# Altium PCB ECUEXT1_23.PcbDoc
Units mm, origin at the board's own origin, x right, y up, seen from the top; angles counter-clockwise.
Board outline 56 x 44.32 mm, 2 copper layers (Top Layer, Bottom Layer); 17 components, 21 nets, 110 pads, 10 vias.
Unrouted connection lines stored in the file: 24.
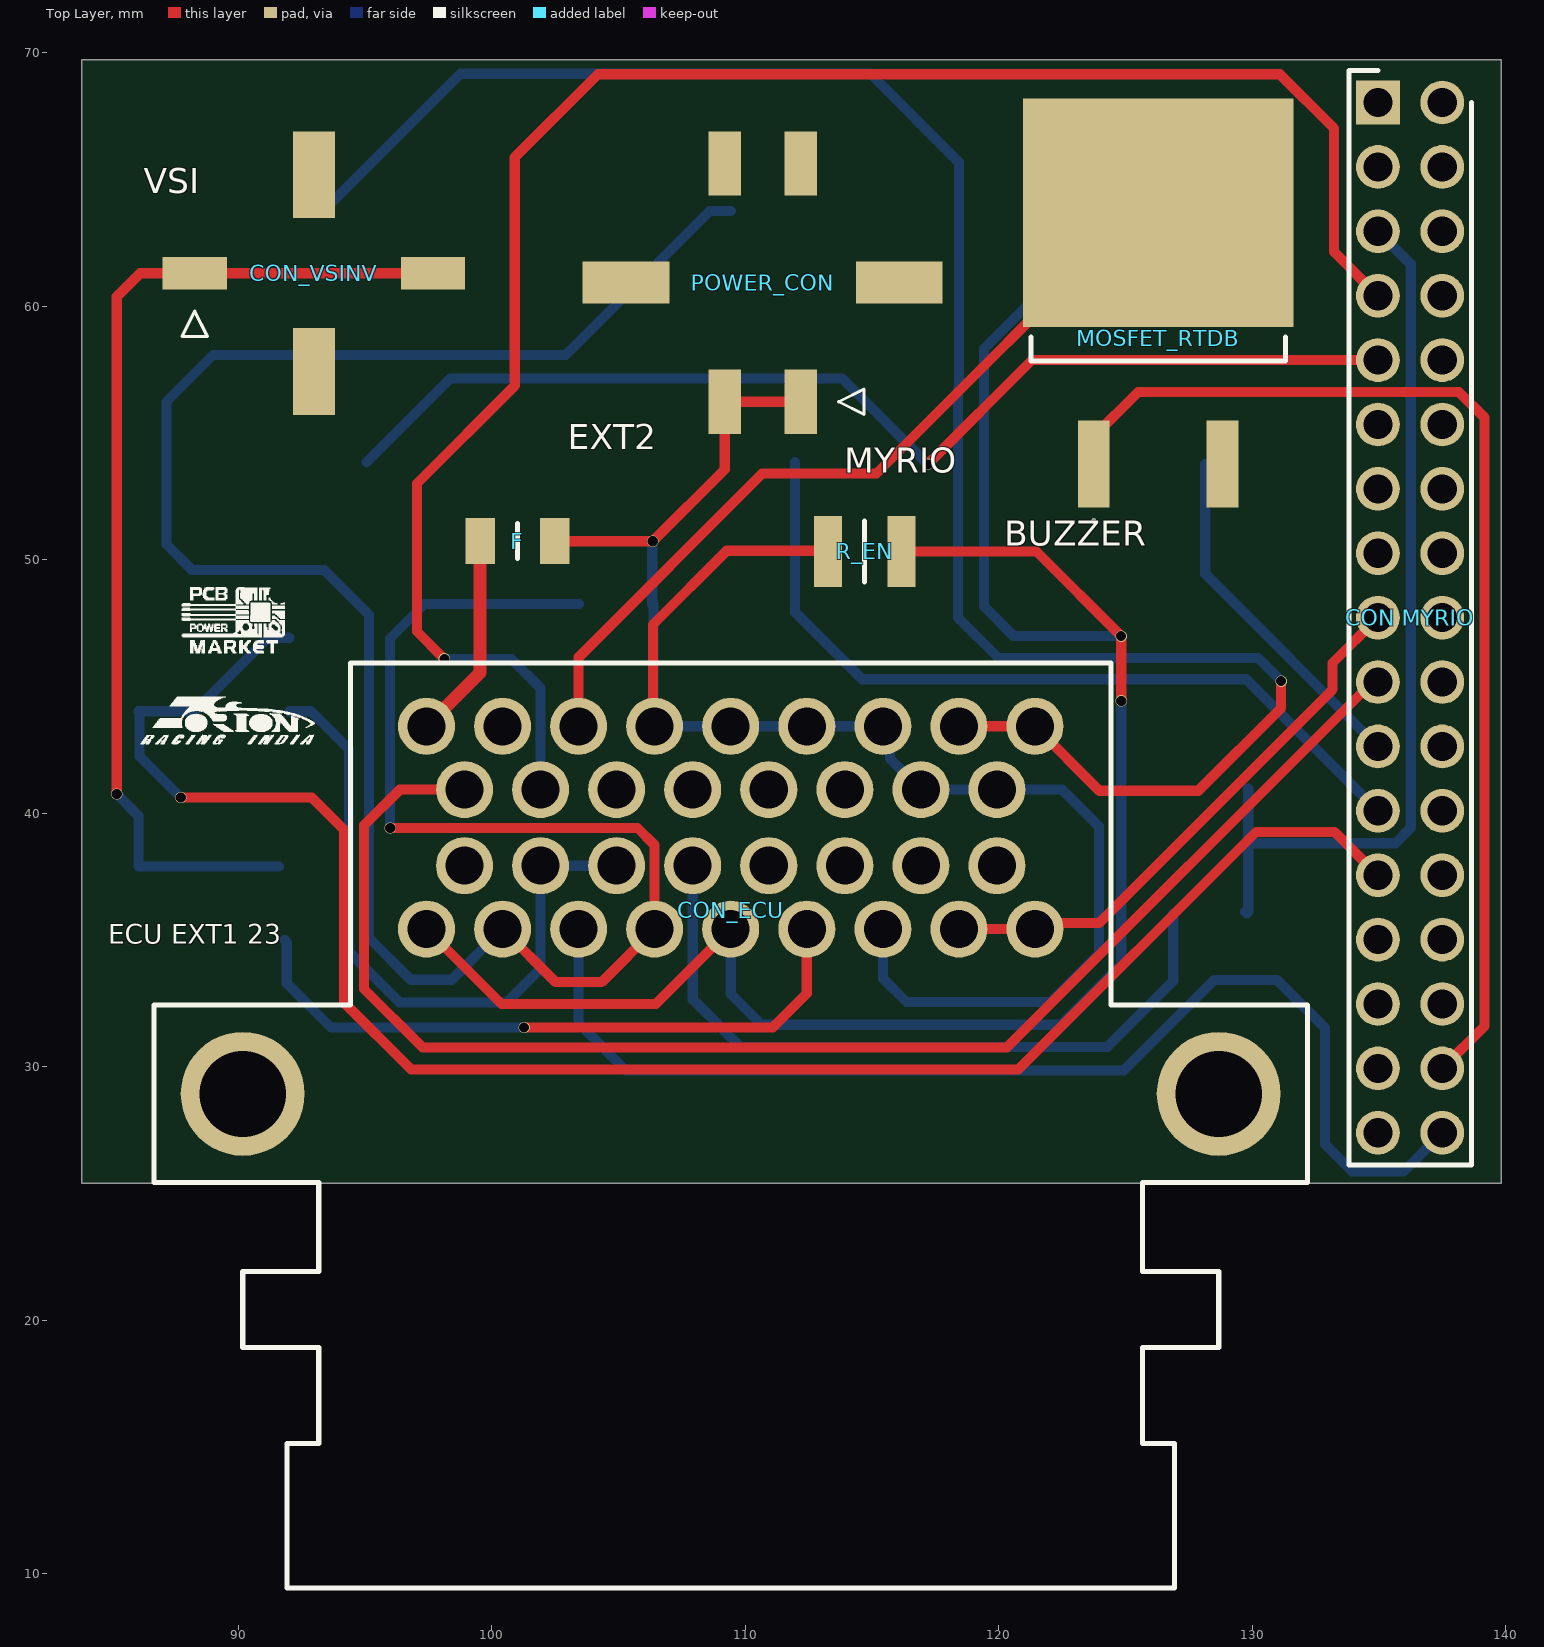
[diagram p0: Top Layer view]
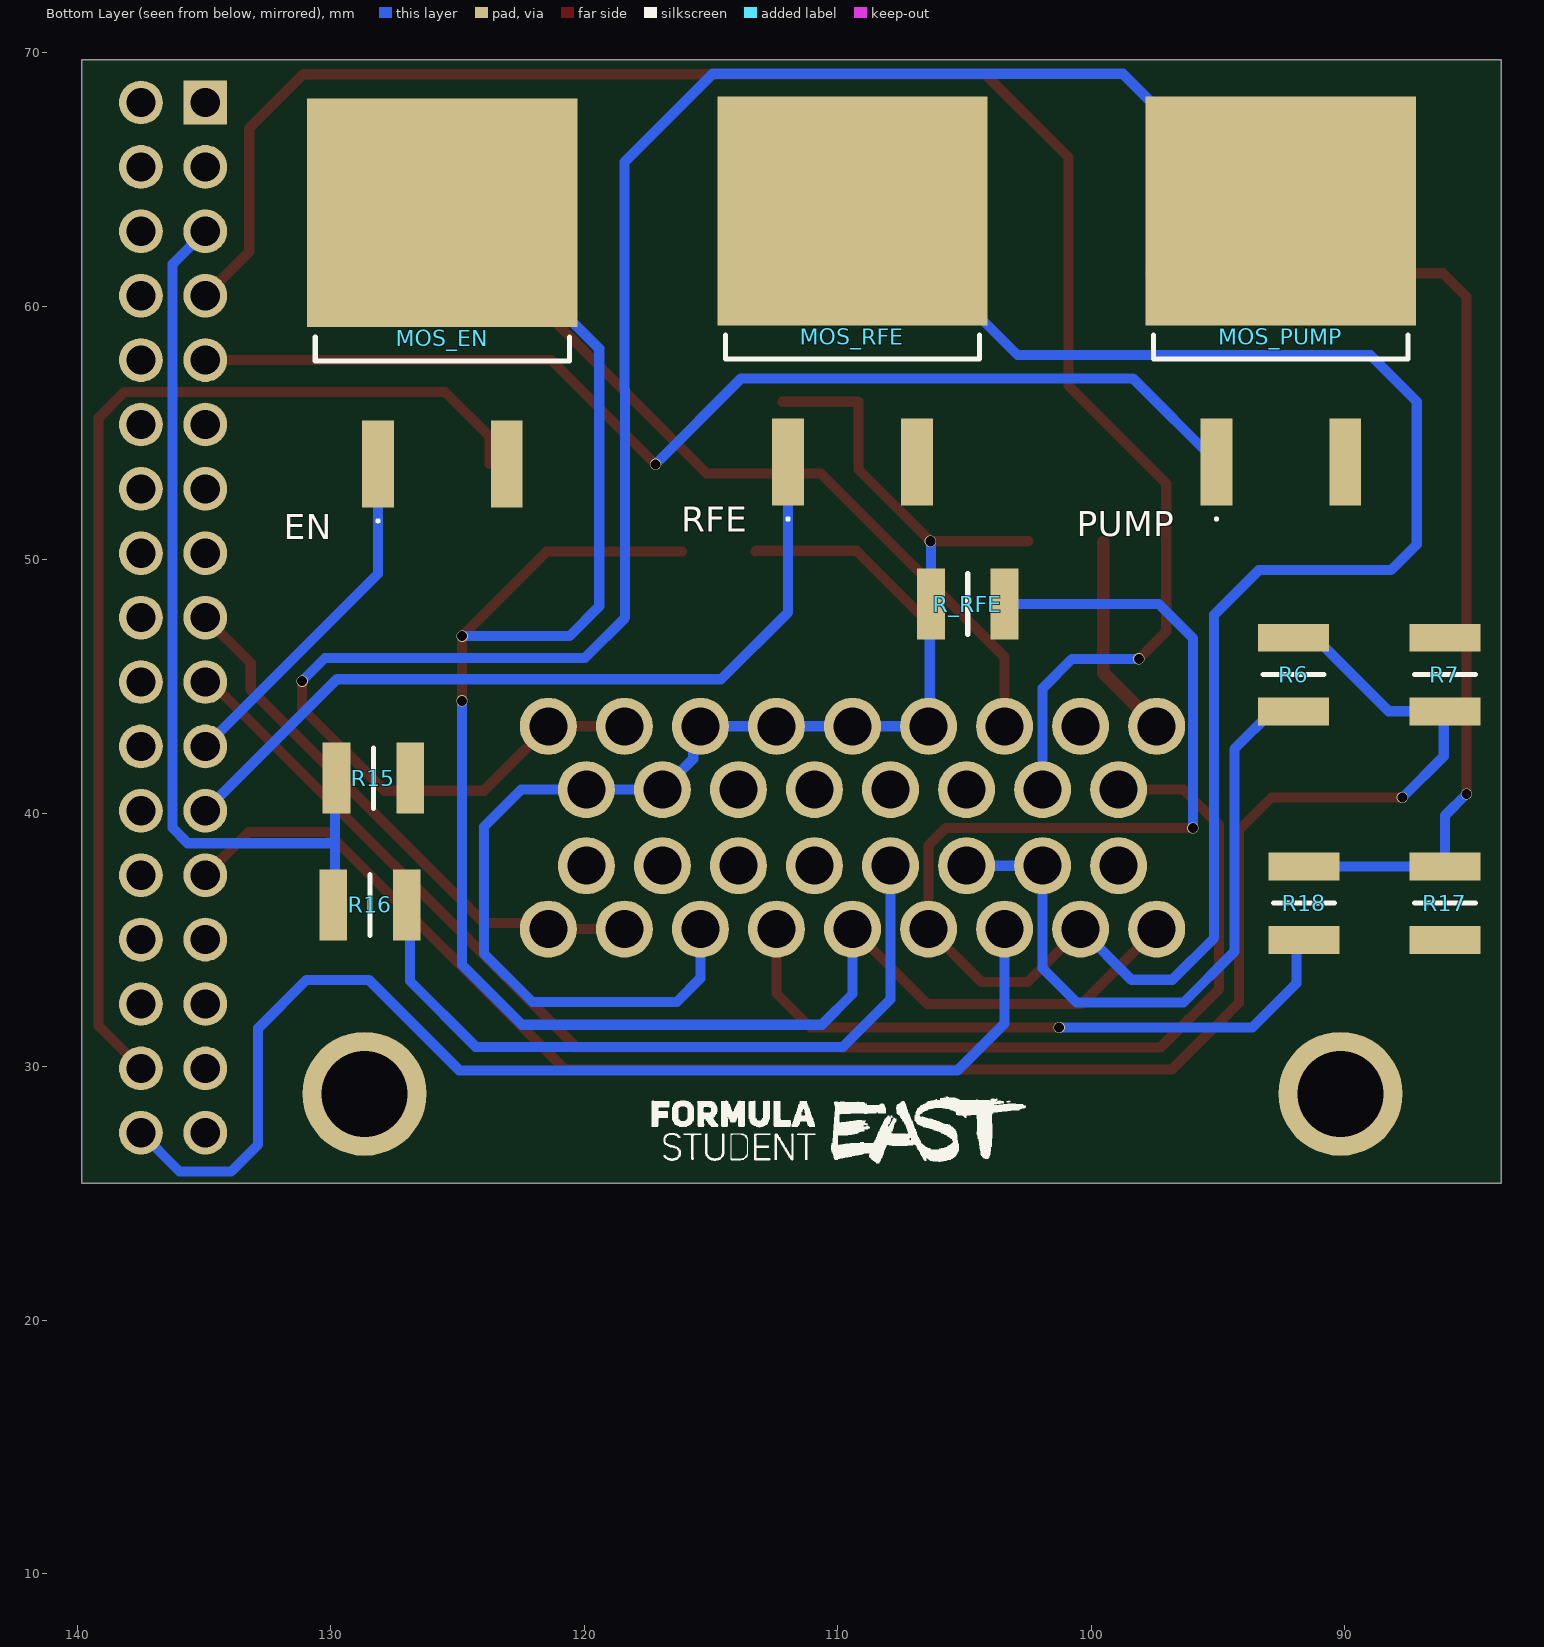
[diagram p1: Bottom Layer view, seen from below]
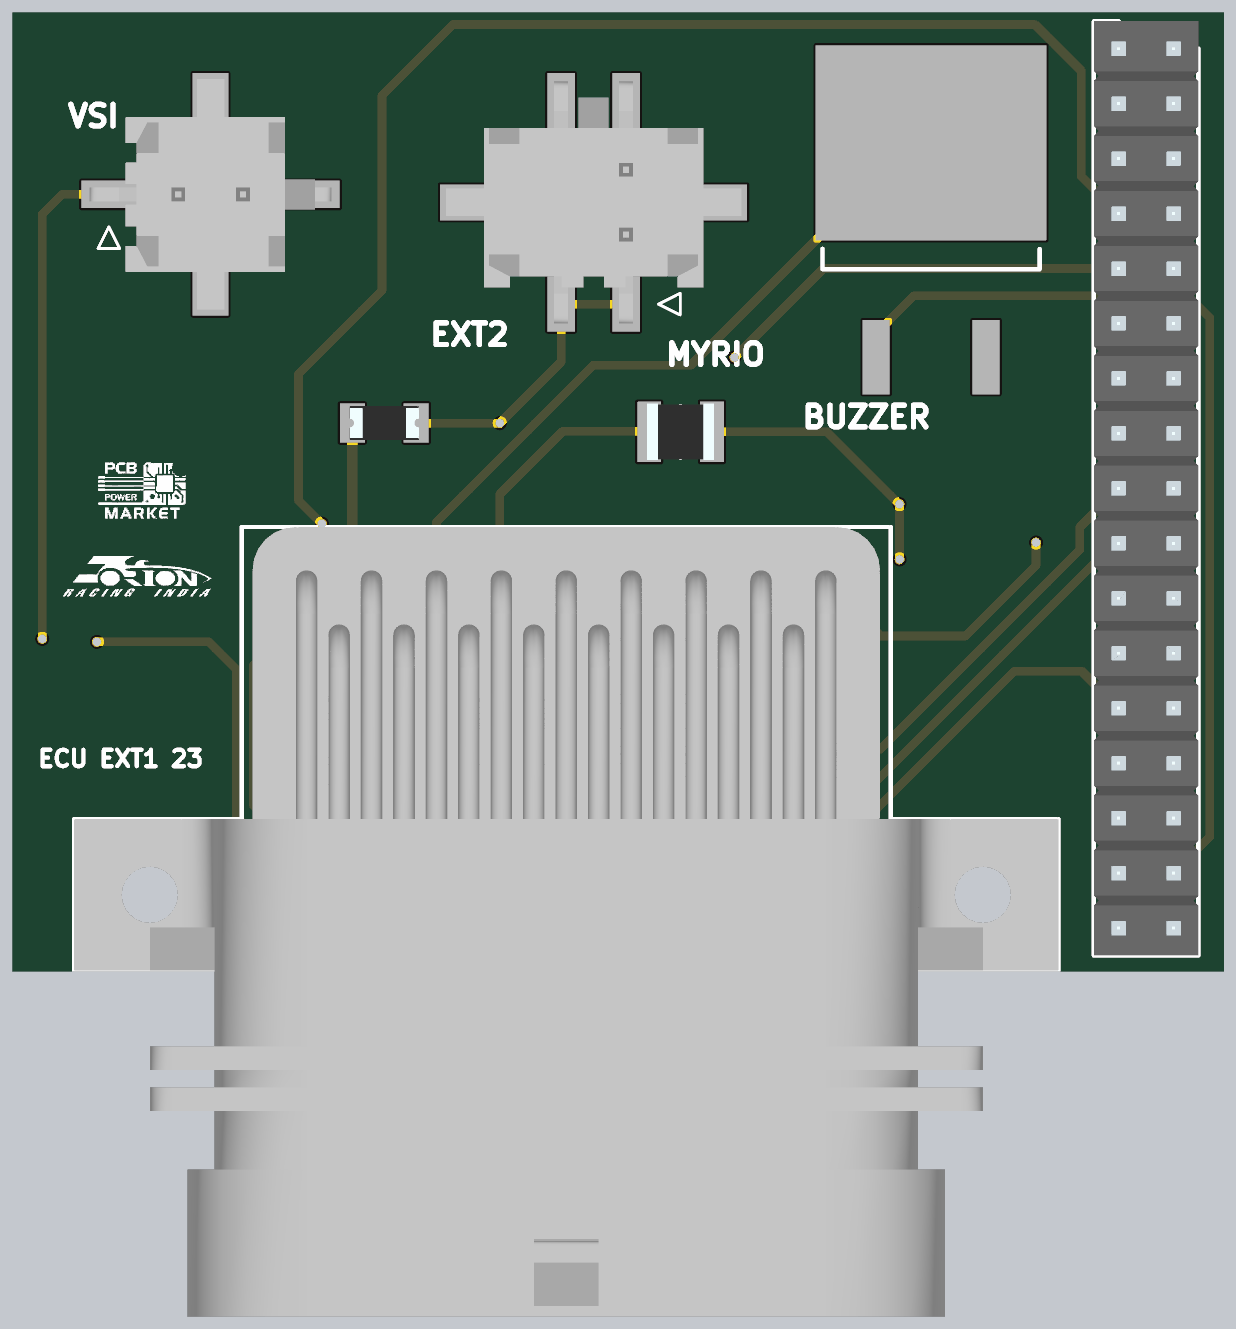
[diagram p2: 3D render of the assembled board from above, using the file's embedded part models]
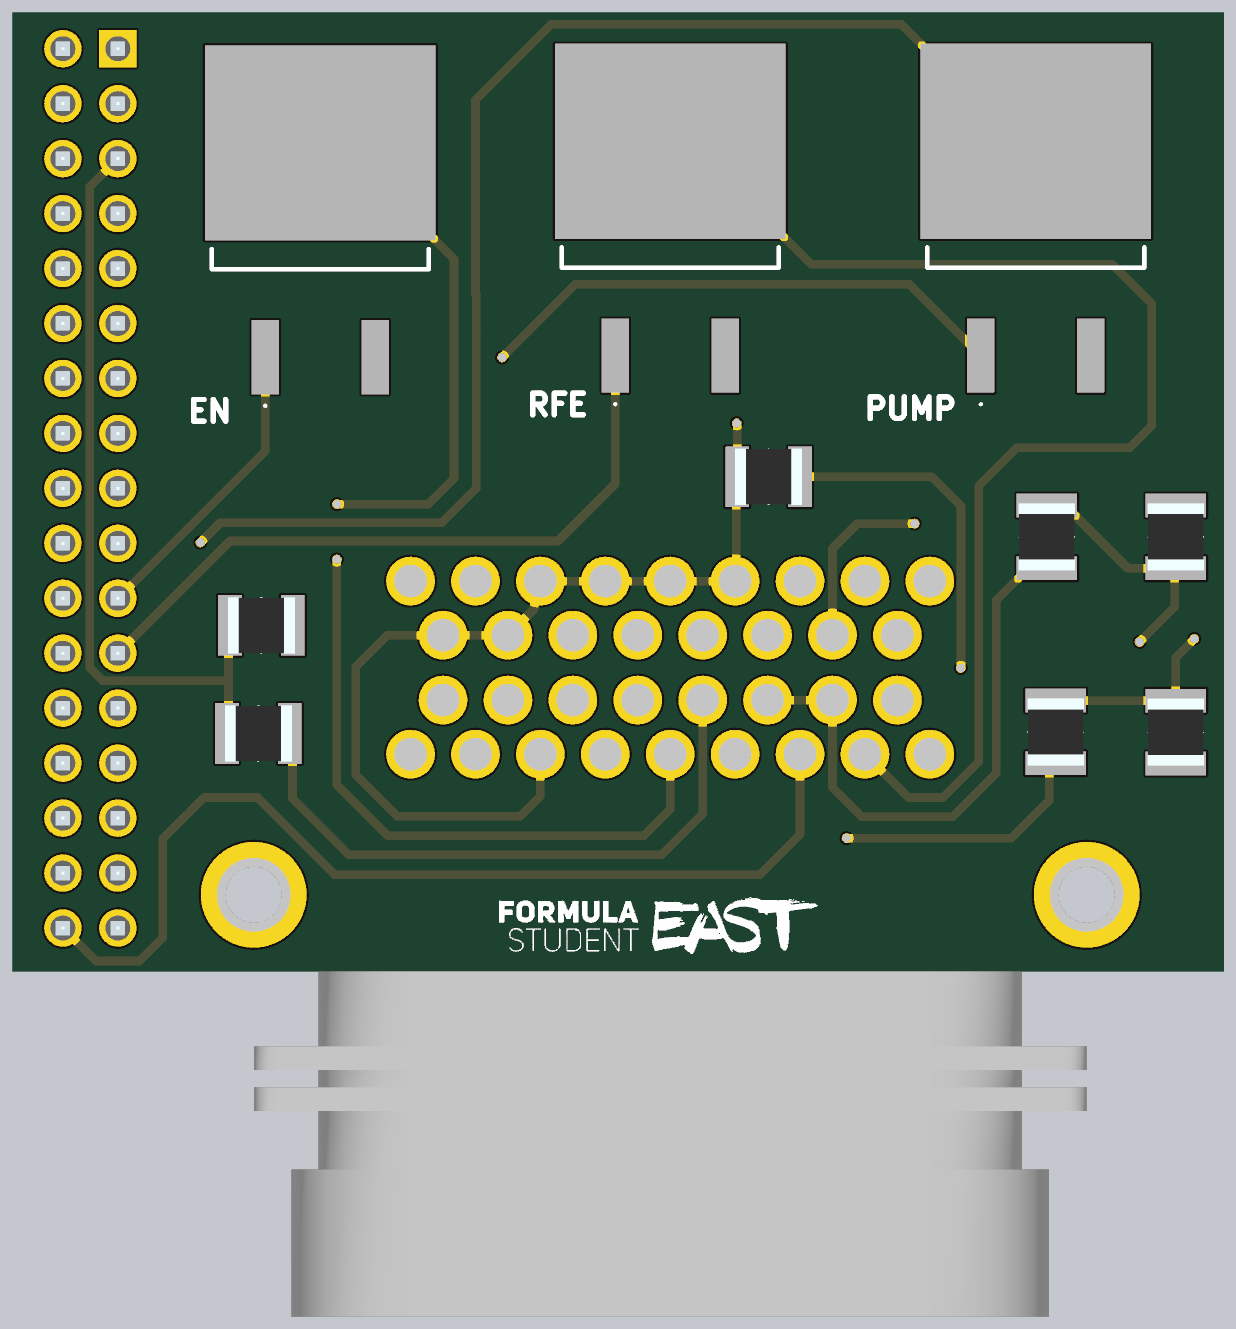
[diagram p3: 3D render of the assembled board from below, using the file's embedded part models]

## Layer stack, top to bottom
Top Solder: solder mask 0.0102, Solder Resist, Dk 3.5
Top Layer: signal copper 0.0356
Dielectric 1: dielectric 0.32, FR-4, Dk 4.8
Bottom Layer: signal copper 0.0356
Bottom Solder: solder mask 0.0102, Solder Resist, Dk 3.5

## Board outline
83.828,25.4 139.827,25.4 139.827,69.723 83.828,69.723

## Design rules (kind name [scope] priority, off if disabled: settings)
Clearance [All] p1: gap=0.1 ignorepadtopadclearanceinfootprint=FALSE
PolygonConnect [All] p1: connectstyle=Relief reliefconductorwidth=0.254 reliefentries=4 polygonreliefangle="90 Angle" airgapwidth=0.254
RoomDefinition ECUEXT1_23 [InComponentClass('ECUEXT1_23')] p1: confinementstyle=ConfineIn formatcopy=TRUE lockcomponents=FALSE outline 0,0 50.8,0 50.8,25.4 0,25.4
RoutingVias [All] p1: holewidth=0.4 width=0.45 viastyle="Through Hole" minholewidth=0.4 minwidth=0.45 maxholewidth=0.4 maxwidth=0.45
SolderMaskExpansion [All] p1: expansion=0.102 istentingtop=FALSE
Width [All] p1: maxlimit=0.5 minlimit=0.4 preferedwidth=0.4 minimp=50.000000 maximp=50.000000 favimp=50.000000
30 further rules are at their usual default settings.

## Components (designator, comment, footprint, x,y, rotation, side; value= is the part's Value field where it differs from the comment)
"CON MYRIO" "67997-234HLF" HDRV34W67P254_2X17_4318X483X858P 134.955,68.038 r270 top
CON_ECU "6437288-1" 6437288-1 109.426,45.933 r0 top
CON_VSINV "43045-0218" 43045-02YY_181920 92.982,61.304 r270 top
F "NANOSMDC020F-2" NANOSMDC016F2 101.014,50.738 r0 top
MOS_EN "SUM40010EL-GE3" SUM40010ELGE3 125.602,62.418 r180 bottom
MOS_PUMP "SUM40010EL-GE3" SUM40010ELGE3 92.53,62.49 r180 bottom
MOS_RFE "SUM40010EL-GE3" SUM40010ELGE3 109.426,62.49 r180 bottom
MOSFET_RTDB "SUM40010EL-GE3" SUM40010ELGE3 126.286,62.418 r0 top
POWER_CON "43045-0419" 43045-04YY_181920 110.688,60.934 r0 top
R6 "3.3k" RESC3126X60N 92.022,45.473 r270 bottom
R7 "2.2k" RESC3126X60N 86.06,45.473 r270 bottom
R15 "RC1210JR-0710KL" RESC3126X60N 128.323,41.384 r0 bottom
R16 "RC1210JR-0710KL" RESC3126X60N 128.458,36.387 r180 bottom
R17 "RC1210JR-0710KL" RESC3126X60N 86.06,36.455 r90 bottom
R18 "RC1210JR-0710KL" RESC3126X60N 91.609,36.459 r270 bottom
R_EN "10k" RESC3126X60N 114.709,50.329 r0 top
R_RFE "10k" RESC3126X60N 104.879,48.253 r180 bottom

## Footprints (in the part's own frame and the unit in brackets; to place one, negate y for a bottom-side part, rotate by r counter-clockwise, add the part's x,y. Pads: shape width x height; smd on the part's side, far side on the other; paste and mask are expansions set on the pad)
43045-02YY_181920 [mm]
  rect 1.27x2.54 smd: 1(0,-4.7) 2(0,4.7)
  rect 3.43x1.65 smd: 3(3.885,0) 4(-3.885,0)
  silkscreen extent 1.5,-5.2 2.5,-4.2, body extent -5.33,-5.6 5.33,5.6, height 9.96
43045-04YY_181920 [mm]
  rect 1.27x2.54 smd: 1(1.5,-4.7) 2(-1.5,-4.7) 3(1.5,4.7) 4(-1.5,4.7)
  rect 3.43x1.65 smd: 5(5.385,0) 6(-5.385,0)
  silkscreen extent 3,-5.2 4,-4.2, body extent -6.83,-5.6 6.83,5.6, height 9.96
6437288-1 [mm]
  round 2.25 hole 1.5: 1(-12,-2.5) 2(-9,-2.5) 3(-6,-2.5) 4(-3,-2.5) 5(0,-2.5) 6(3,-2.5) 7(6,-2.5) 8(9,-2.5) 9(12,-2.5) 10(-10.5,-5) 11(-7.5,-5) 12(-4.5,-5) 13(-1.5,-5) 14(1.5,-5) 15(4.5,-5) 16(7.5,-5) 17(10.5,-5) 18(-10.5,-8) 19(-7.5,-8) 20(-4.5,-8) 21(-1.5,-8) 22(1.5,-8) 23(4.5,-8) 24(7.5,-8) 25(10.5,-8) 26(-12,-10.5) 27(-9,-10.5) 28(-6,-10.5) 29(-3,-10.5) 30(0,-10.5) 31(3,-10.5) 32(6,-10.5) 33(9,-10.5) 34(12,-10.5)
  round 4.89 hole 3.4: 35(19.25,-17) 36(-19.25,-17)
  silkscreen extent -22.75,-36.5 22.75,0, body extent -22.75,-36.5 22.75,0, height 28.16
HDRV34W67P254_2X17_4318X483X858P [mm]
  rect 1.725x1.725 hole 1.15: 1(0,0)
  round 1.725 hole 1.15: 2(0,2.54) 3(2.54,0) 4(2.54,2.54) 5(5.08,0) 6(5.08,2.54) 7(7.62,0) 8(7.62,2.54) 9(10.16,0) 10(10.16,2.54) 11(12.7,0) 12(12.7,2.54) 13(15.24,0) 14(15.24,2.54) 15(17.78,0) 16(17.78,2.54) 17(20.32,0) 18(20.32,2.54) 19(22.86,0) 20(22.86,2.54) 21(25.4,0) 22(25.4,2.54) 23(27.94,0) 24(27.94,2.54) 25(30.48,0) 26(30.48,2.54) 27(33.02,0) 28(33.02,2.54) 29(35.56,0) 30(35.56,2.54) 31(38.1,0) 32(38.1,2.54) 33(40.64,0) 34(40.64,2.54)
  silkscreen extent -1.27,-1.14 41.91,3.68, body extent -1.27,-1.14 41.91,3.68, height 8.58
NANOSMDC016F2 [mm]
  rect 1.16x1.81 smd: 1(-1.475,0) 2(1.475,0)
  silkscreen extent 0,-0.69 0,0.69, body extent -1.6,-0.79 1.6,0.79, height 0.82
RESC3126X60N [mm]
  rect 1.1x2.8 smd: 1(-1.45,0) 2(1.45,0)
  silkscreen extent 0,-1.2 0,1.2, body extent -1.55,-1.3 1.55,1.3, height 0.6
SUM40010ELGE3 [mil]
  rect 49.49x135 smd: 1(-100,-340) 3(100,-340)
  rect 420x355 smd: 2(0,50)
  silkscreen extent -197,-430 198,-143

## Part data
"CON MYRIO": "Connector", Manufacturer_Name=Amphenol, Mouser Part Number=649-67997-234HLF, Arrow Part Number=67997-234HLF, Arrow Price/Stock=https://www.arrow.com/en/products/67997-234hlf/amphenol-fci?region=nac, Datasheet Link=https://cdn.amphenol-icc.com/media/wysiwyg/files/drawing/67996.pdf, Height=8.58mm, Manufacturer_Part_Number=67997-234HLF, Mouser Price/Stock=https://www.mouser.co.uk/ProductDetail/Amphenol-FCI/67997-234HLF?qs=zh4O8xspOuxBU73L6U2QCQ%3D%3D
CON_ECU: "Connector", Manufacturer_Name="TE Connectivity", Mouser Part Number=571-6437288-1, Arrow Part Number=6437288-1, Arrow Price/Stock=https://www.arrow.com/en/products/6437288-1/te-connectivity, Datasheet Link=http://www.te.com/commerce/DocumentDelivery/DDEController?Action=srchrtrv&DocNm=6437288-1&DocType=Customer+Drawing&DocLang=Japanese, Manufacturer_Part_Number=6437288-1, Mouser Price/Stock=https://www.mouser.co.uk/ProductDetail/TE-Connectivity/6437288-1?qs=WBj8811fzwGYtKR8aBSJZw%3D%3D
CON_VSINV: "Connector", Manufacturer_Name=Molex, Mouser Part Number=538-43045-0218, Arrow Part Number=43045-0218, Arrow Price/Stock=https://www.arrow.com/en/products/43045-0218/molex, Datasheet Link=https://www.molex.com/pdm_docs/sd/430450218_sd.pdf, Height=9.91mm, Manufacturer_Part_Number=43045-0218, Mouser Price/Stock=https://www.mouser.co.uk/ProductDetail/Molex/43045-0218?qs=4XSMV6Twtb2qUKINalLbdA%3D%3D
F: "Resettable Fuse", Manufacturer_Name=LITTELFUSE, Mouser Part Number=650-NANOSMDC020F-2, Arrow Part Number=NANOSMDC020F-2, Arrow Price/Stock=https://www.arrow.com/en/products/nanosmdc020f-2/littelfuse, Datasheet Link=https://www.littelfuse.com/~/media/electronics/datasheets/resettable_ptcs/littelfuse_ptc_nanosmdc_datasheet.pdf.pdf, Height=1mm, Manufacturer_Part_Number=NANOSMDC020F-2, Mouser Price/Stock=https://www.mouser.co.uk/ProductDetail/Littelfuse/NANOSMDC020F-2?qs=iK0evp%252BCRRU6agwMt7HYjg%3D%3D
MOS_EN MOS_PUMP MOS_RFE MOSFET_RTDB: "MOSFET (N-Channel)", Manufacturer_Name=Vishay, Mouser Part Number=78-SUM40010EL-GE3, Arrow Part Number=SUM40010EL-GE3, Arrow Price/Stock=https://www.arrow.com/en/products/sum40010el-ge3/vishay, Datasheet Link=https://www.vishay.com/docs/66984/sum40010el.pdf, Height=5.08mm, Manufacturer_Part_Number=SUM40010EL-GE3, Mouser Price/Stock=https://www.mouser.com/Search/Refine.aspx?Keyword=78-SUM40010EL-GE3
POWER_CON: "Connector", Manufacturer_Name=Molex, Mouser Part Number=538-43045-0419, Datasheet Link=https://www.molex.com/pdm_docs/sd/430450218_sd.pdf, Height=9.91mm, Manufacturer_Part_Number=43045-0419, Mouser Price/Stock=https://www.mouser.co.uk/ProductDetail/Molex/43045-0419?qs=UeCeOHRHQebVNIQyI9VWWg%3D%3D
R6 R7 R_EN R_RFE: library part RC1210JR-0710KL, "Resistor", Manufacturer_Name="YAGEO (PHYCOMP)", Mouser Part Number=603-RC1210JR-0710KL, Arrow Part Number=RC1210JR-0710KL, Arrow Price/Stock=https://www.arrow.com/en/products/rc1210jr-0710kl/yageo, Datasheet Link=https://datasheet.datasheetarchive.com/originals/distributors/Datasheets_SAMA/902f9e387b938f871d31120f5fc1d65e.pdf, Height=0.6mm, Manufacturer_Part_Number=RC1210JR-0710KL, Mouser Price/Stock=https://www.mouser.co.uk/ProductDetail/YAGEO/RC1210JR-0710KL?qs=6sj9KdP9svgfoubno5Jb%252BA%3D%3D
R15 R16 R17 R18: "Resistor", Manufacturer_Name="YAGEO (PHYCOMP)", Mouser Part Number=603-RC1210JR-0710KL, Arrow Part Number=RC1210JR-0710KL, Arrow Price/Stock=https://www.arrow.com/en/products/rc1210jr-0710kl/yageo, Datasheet Link=https://datasheet.datasheetarchive.com/originals/distributors/Datasheets_SAMA/902f9e387b938f871d31120f5fc1d65e.pdf, Height=0.6mm, Manufacturer_Part_Number=RC1210JR-0710KL, Mouser Price/Stock=https://www.mouser.co.uk/ProductDetail/YAGEO/RC1210JR-0710KL?qs=6sj9KdP9svgfoubno5Jb%252BA%3D%3D

## Via types
v1: diameter 0.45, hole 0.4, Top Layer to Bottom Layer, 10 vias

## Nets (pads, with @x,y where several pads share a name; then routed paths per layer and width w, separated by ;. In a path a pad name is that pad's centre, name@x,y a point inside that pad or via, vN(x,y) a via of type N, cw(c..) or ccw(c..) an arc to the next point about the centre after c; other vN are vias at no path point)
+12: CON_ECU.4 CON_ECU.5 CON_ECU.6 CON_ECU.7 CON_ECU.16 CON_ECU.17 CON_ECU.32 F.2 POWER_CON.1 POWER_CON.2 R_EN.1 R_RFE.1 | length 69.5
  Top Layer w0.4: F.2 102.498,50.729 v1(106.352,50.729) 109.188,53.565 POWER_CON.2 POWER_CON.1 ; CON_ECU.4 106.357,43.502 106.357,47.448 109.267,50.358 113.23,50.358 R_EN.1
  Bottom Layer w0.4: R_RFE.1 106.329,50.692 106.352,50.715 v1(106.352,50.729) ; R_RFE.1@106.379,48.253 106.379,43.48 CON_ECU.4 CON_ECU.5 CON_ECU.6 CON_ECU.7 115.706,43.153 115.706,42.153 CON_ECU.16 CON_ECU.17 122.501,40.933 123.959,39.475 123.959,34.464 122.052,32.557 116.361,32.557 115.426,33.492 CON_ECU.32
AI3/BAMOCAR: "CON MYRIO.25" R6.1 R7.2 | length 71.5
  Top Layer w0.4: v1(87.733,40.622) 92.901,40.622 94.183,39.34 94.183,32.528 96.813,29.898 120.777,29.898 130.145,39.266 133.247,39.266 134.955,37.558
  Bottom Layer w0.4: v1(87.733,40.622) 86.104,42.251 86.104,43.979 R7.2 88.272,44.023 91.172,46.923 R6.1
AO0/APPS: "CON MYRIO.34" CON_ECU.28 | length 46.5
  Bottom Layer w0.4: CON_ECU.28 103.426,31.712 105.277,29.861 124.939,29.861 128.508,33.43 130.963,33.43 132.872,31.521 132.872,26.939 133.938,25.873 135.97,25.873 137.495,27.398
AO1/RTD_BUZZER: "CON MYRIO.32" MOSFET_RTDB.1 | length 44
  Top Layer w0.4: MOSFET_RTDB.1 123.746,54.868 125.499,56.621 138.149,56.621 139.164,55.606 139.164,31.607 137.495,29.938
BUZZER: CON_ECU.3 MOSFET_RTDB.2 | length 32.8
  Top Layer w0.4: CON_ECU.3 103.426,46.16 110.672,53.406 115.178,53.406 125.461,63.688 MOSFET_RTDB.2
DIO0/RFE: "CON MYRIO.23" MOS_RFE.1 | length 32.2
  Bottom Layer w0.4: MOS_RFE.1 111.966,47.931 114.611,45.286 129.767,45.286 134.955,40.098
DIO1/EN: "CON MYRIO.21" MOS_EN.1 | length 14
  Bottom Layer w0.4: MOS_EN.1 128.142,49.451 134.955,42.638
DIO2/RTD_BUTTON: "CON MYRIO.19" CON_ECU.10 | length 57.9
  Top Layer w0.4: CON_ECU.10 96.367,40.933 94.963,39.529 94.963,33.069 97.266,30.766 120.327,30.766 134.739,45.178 134.955,45.178
DIO3/RTD_BRAKE: "CON MYRIO.17" CON_ECU.33 CON_ECU.34 | length 22.2
  Top Layer w0.4: CON_ECU.33 CON_ECU.34 121.66,35.667 123.954,35.667 133.164,44.877 133.164,45.927 134.955,47.718
DIO8/PUMP_OUT: "CON MYRIO.9" MOS_PUMP.1 | length 44.4
  Top Layer w0.4: v1(117.196,53.766) 121.308,57.878 134.955,57.878
  Bottom Layer w0.4: MOS_PUMP.1 98.371,57.156 113.815,57.156 117.196,53.775 v1(117.196,53.766)
DIO9/PUMP_CONTROL: "CON MYRIO.7" CON_ECU.11 | length 72
  Top Layer w0.4: v1(98.129,46.09) 97.049,47.17 97.049,53.01 100.908,56.869 100.908,65.875 104.187,69.154 131.087,69.154 133.223,67.018 133.223,62.15 134.955,60.418
  Bottom Layer w0.4: v1(98.129,46.09) 100.774,46.09 101.926,44.938 CON_ECU.11
EN: CON_ECU.26 CON_ECU.30 MOS_EN.2 R_EN.2 | length 81.4
  Top Layer w0.4: CON_ECU.26 100.381,32.478 106.471,32.478 CON_ECU.30 ; R_EN.2 121.487,50.329 v1(124.826,46.99) 124.828,46.988 124.828,44.435 v1(124.831,44.432)
  Bottom Layer w0.4: CON_ECU.30 109.426,32.874 110.641,31.659 122.462,31.659 124.831,34.028 v1(124.831,44.432) ; v1(124.826,46.99) 120.589,46.99 119.417,48.162 119.417,58.329 124.776,63.688 MOS_EN.2
GND: "CON MYRIO.6" "CON MYRIO.8" "CON MYRIO.12" "CON MYRIO.16" "CON MYRIO.20" "CON MYRIO.24" "CON MYRIO.28" "CON MYRIO.30" CON_ECU.2 CON_ECU.12 CON_ECU.13 CON_ECU.14 CON_ECU.18 CON_ECU.22 CON_ECU.23 CON_ECU.25 MOS_EN.3 MOS_PUMP.3 MOS_RFE.3 MOSFET_RTDB.3 POWER_CON.3 POWER_CON.4 R7.1 R15.1 R17.1
PUMP: CON_ECU.8 CON_ECU.9 MOS_PUMP.2 | length 77.5
  Top Layer w0.4: CON_ECU.8 CON_ECU.9 123.967,40.892 127.874,40.892 131.138,44.156 v1(131.138,45.216)
  Bottom Layer w0.4: MOS_PUMP.2 93.355,63.76 98.767,69.172 114.938,69.172 118.426,65.684 118.426,56.743 118.393,56.71 118.393,47.717 119.987,46.123 130.231,46.123 v1(131.138,45.216)
PUMP_BAMOCAR: CON_ECU.19 CON_ECU.20 R6.2 | length 27
  Bottom Layer w0.4: R6.2 92.872,44.023 94.361,42.534 94.361,34.544 96.369,32.536 100.585,32.536 101.926,33.877 CON_ECU.19 CON_ECU.20
RFE: CON_ECU.27 CON_ECU.29 MOS_RFE.2 R_RFE.2 | length 96.9
  Top Layer w0.4: v1(95.996,39.419) 105.747,39.419 106.426,38.74 CON_ECU.29 104.333,33.34 102.519,33.34 CON_ECU.27
  Bottom Layer w0.4: v1(95.996,39.419) 95.988,39.427 95.988,46.894 97.347,48.253 R_RFE.2 ; CON_ECU.27 98.426,33.433 96.81,33.433 95.16,35.083 95.16,47.837 93.404,49.593 88.18,49.593 87.169,50.604 87.169,56.242 89.002,58.075 102.915,58.075 108.601,63.76 MOS_RFE.2
SPARE: CON_ECU.21 R16.2 | length 28.7
  Bottom Layer w0.4: CON_ECU.21 107.926,32.659 109.798,30.787 124.286,30.787 126.882,33.383 R16.2@126.882,36.049
SPARE5V: "CON MYRIO.5" R15.2 R16.1 | length 35.7
  Bottom Layer w0.4: R16.1@129.714,36.117 R16.1@129.782,36.049 ; R16.1@129.84,36.117 129.84,38.821 ; R15.2@129.84,40.979 129.84,38.821 ; 134.955,62.958 136.252,61.661 136.252,39.425 135.648,38.821 129.84,38.821
SUPPLY: CON_ECU.1 F.1 | length 8.1
  Top Layer w0.5: CON_ECU.1 99.536,45.543 F.1@99.536,50.686
VS_INV_CONNECTOR: CON_ECU.31 R18.2 | length 26.1
  Top Layer w0.4: v1(101.273,31.55) 111.081,31.55 112.426,32.895 CON_ECU.31
  Bottom Layer w0.4: R18.2@91.831,35.005 91.91,34.926 91.91,33.298 93.658,31.55 v1(101.273,31.55)
VS_INV_IN: CON_VSINV.1 CON_VSINV.2 R17.2 R18.1 | length 41.2
  Top Layer w0.4: v1(85.205,40.761) 85.205,60.378 86.131,61.304 CON_VSINV.1 CON_VSINV.2
  Bottom Layer w0.4: v1(85.205,40.761) 86.06,39.906 R17.2 R18.1@91.609,37.905
pads on no net: "CON MYRIO.1" "CON MYRIO.2" "CON MYRIO.3" "CON MYRIO.4" "CON MYRIO.10" "CON MYRIO.11" "CON MYRIO.13" "CON MYRIO.14" "CON MYRIO.15" "CON MYRIO.18" "CON MYRIO.22" "CON MYRIO.26" "CON MYRIO.27" "CON MYRIO.29" "CON MYRIO.31" "CON MYRIO.33" CON_ECU.15 CON_ECU.24 CON_ECU.35 CON_ECU.36 CON_VSINV.3 CON_VSINV.4 POWER_CON.5 POWER_CON.6

## Silkscreen, mask and mechanical layers (free items; w line width, h text height)
Top Overlay:
  drawing of 48 lines, arcs and shapes, not listed
  text "VSI" at 86.263,64.453 h1
  text "EXT2" at 103.003,54.354 h1
  text "MYRIO" at 113.899,53.435 h1
  text "BUZZER" at 120.211,50.549 h1
  text "ECU EXT1 23" at 84.872,34.863 h0.76
Bottom Overlay:
  drawing of 17 lines, arcs and shapes, not listed
  text "RFE" at 116.184,51.107 h1
  text "PUMP" at 100.587,50.934 h1
  text "EN" at 131.855,50.811 h1